# EAGLE board routed (EAGLE 9.6.2)
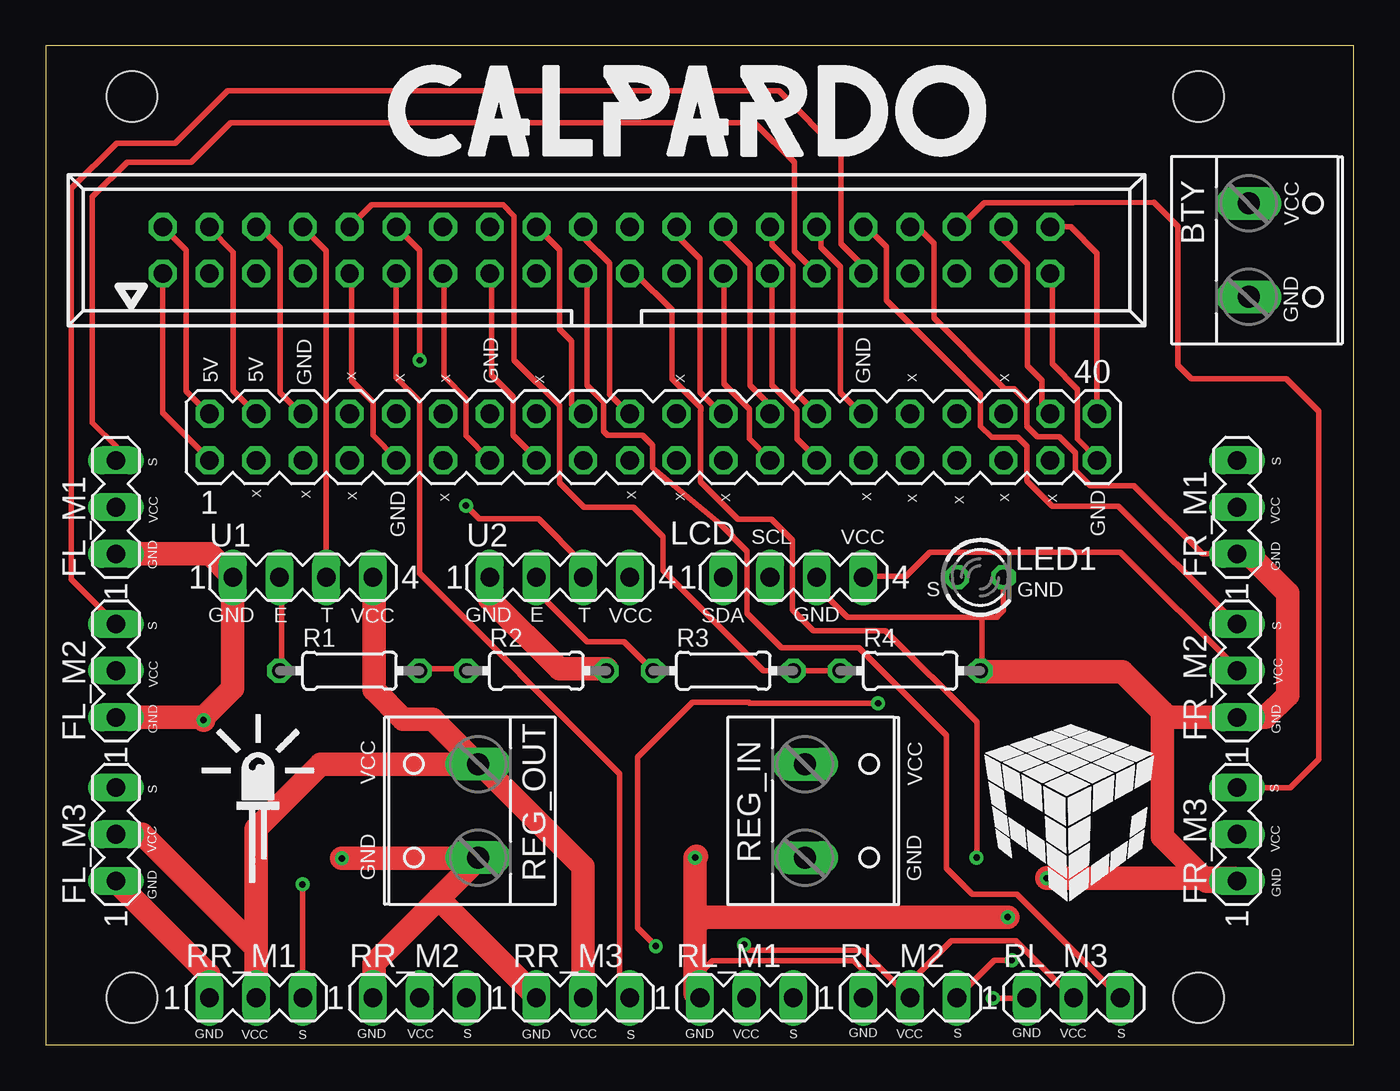
[diagram p0: board, top side]
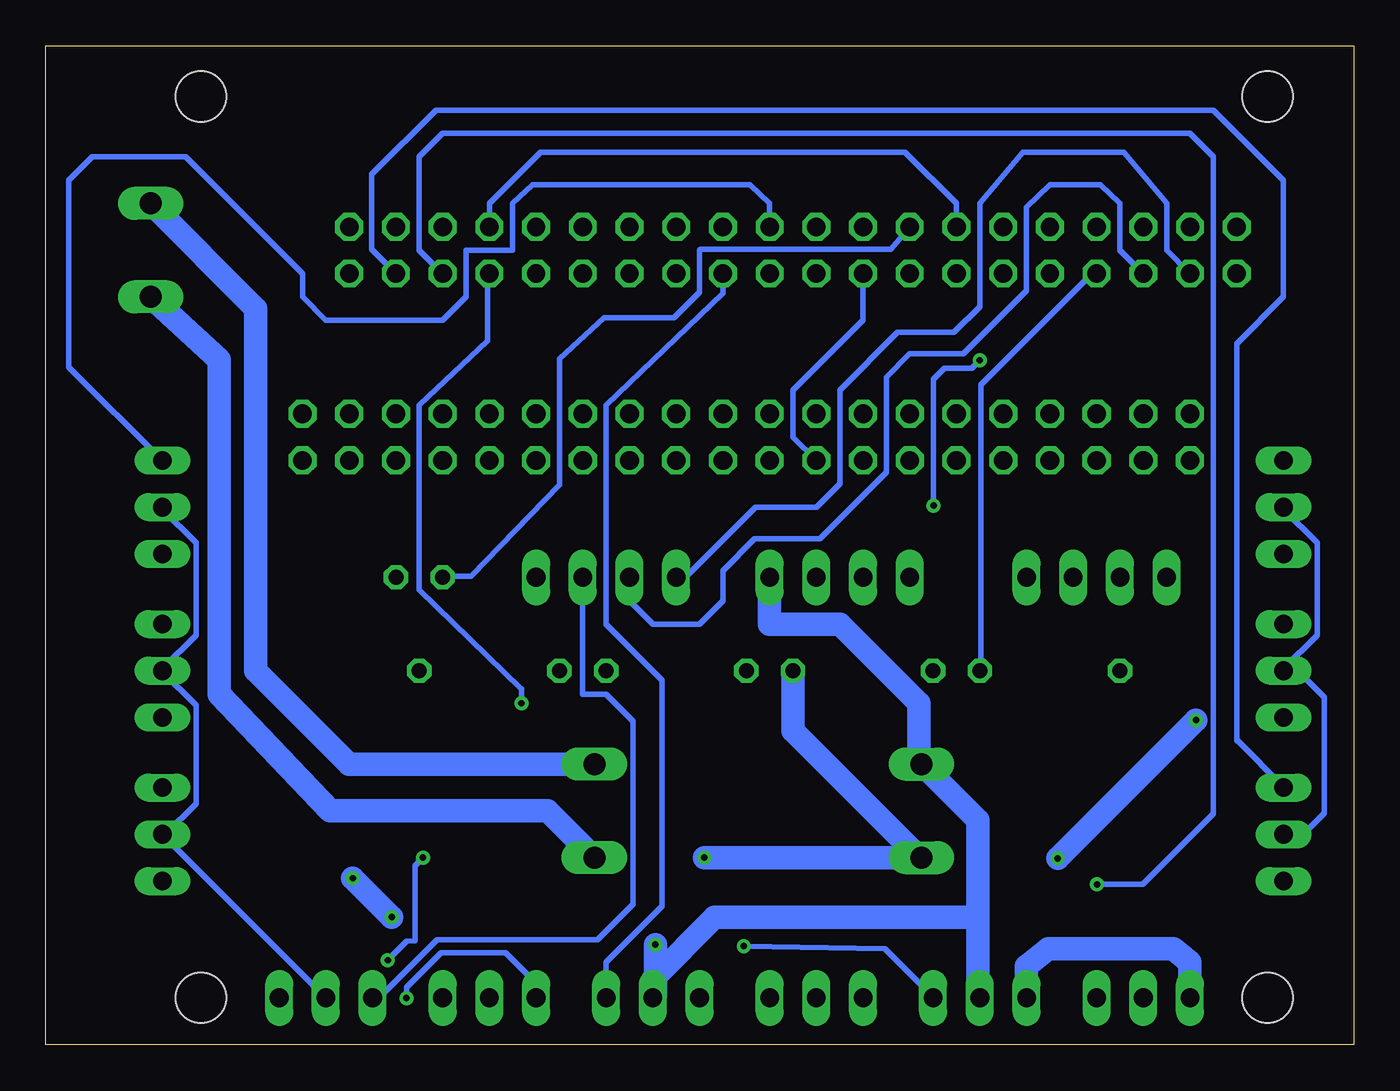
[diagram p1: board, bottom side, seen from below]

Size 71.1 x 54.28 mm. Coordinates in mm from the lower left corner, seen from the top.
Outline: 0,0 71.1,0 71.1,54.28 0,54.28 0,0
Copper layers (1*16): Top 0.035mm / dielectric 1.5mm / Bottom 0.035mm
Design rules "default": minimum track width 6mil, minimum drill 0.35mm, track to track 6mil, track to pad 6mil, pad to pad 6mil, via to via 6mil, smd to smd 6mil, copper to edge 40mil, drill to drill 6mil, minimum pad ring 10mil, minimum via ring 8mil, stop-mask expansion 4mil, vias tented up to drill 0mil, thermal gap 10mil
Holes 2.74 mm at 4.68,2.54 62.68,2.54 62.68,51.54 4.68,51.54

## Footprints (pad centres in the part's own frame; a part is rotated, then mirrored left to right if it is on the bottom)
W237-132 = drill 1.194 long: 1 -2.54,-0.635; 2 2.54,-0.635
MA03-1 = drill 1.016 long: 1 -2.54,0; 2 0,0; 3 2.54,0
MA04-1 = drill 1.016 long: 1 -3.81,0; 2 -1.27,0; 3 1.27,0; 4 3.81,0
LED3MM = drill 0.813 octagon: A -1.27,0; K 1.27,0
0204/7 = drill 0.813 octagon: 1 -3.81,0; 2 3.81,0
MA20-2 = drill 1.016 octagon: 1 -24.13,-1.27; 2 -24.13,1.27; 3 -21.59,-1.27; 4 -21.59,1.27; 5 -19.05,-1.27; 6 -19.05,1.27; 7 -16.51,-1.27; 8 -16.51,1.27; 9 -13.97,-1.27; 10 -13.97,1.27; 11 -11.43,-1.27; 12 -11.43,1.27; 13 -8.89,-1.27; 14 -8.89,1.27; 15 -6.35,-1.27; 16 -6.35,1.27; 17 -3.81,-1.27; 18 -3.81,1.27; 19 -1.27,-1.27; 20 -1.27,1.27; 21 1.27,-1.27; 22 1.27,1.27; 23 3.81,-1.27; 24 3.81,1.27; 25 6.35,-1.27; 26 6.35,1.27; 27 8.89,-1.27; 28 8.89,1.27; 29 11.43,-1.27; 30 11.43,1.27; 31 13.97,-1.27; 32 13.97,1.27; 33 16.51,-1.27; 34 16.51,1.27; 35 19.05,-1.27; 36 19.05,1.27; 37 21.59,-1.27; 38 21.59,1.27; 39 24.13,-1.27; 40 24.13,1.27
057-040-1 = drill 1 octagon: 1 -24.13,-1.27; 2 -24.13,1.27; 3 -21.59,-1.27; 4 -21.59,1.27; 5 -19.05,-1.27; 6 -19.05,1.27; 7 -16.51,-1.27; 8 -16.51,1.27; 9 -13.97,-1.27; 10 -13.97,1.27; 11 -11.43,-1.27; 12 -11.43,1.27; 13 -8.89,-1.27; 14 -8.89,1.27; 15 -6.35,-1.27; 16 -6.35,1.27; 17 -3.81,-1.27; 18 -3.81,1.27; 19 -1.27,-1.27; 20 -1.27,1.27; 21 1.27,-1.27; 22 1.27,1.27; 23 3.81,-1.27; 24 3.81,1.27; 25 6.35,-1.27; 26 6.35,1.27; 27 8.89,-1.27; 28 8.89,1.27; 29 11.43,-1.27; 30 11.43,1.27; 31 13.97,-1.27; 32 13.97,1.27; 33 16.51,-1.27; 34 16.51,1.27; 35 19.05,-1.27; 36 19.05,1.27; 37 21.59,-1.27; 38 21.59,1.27; 39 24.13,-1.27; 40 24.13,1.27

## Placement (x,y rotation side)
BTY  [W237-132]  66.04,43.18 270 top
FL_M1  [MA03-1]  3.81,29.21 90 top
FL_M2  [MA03-1]  3.81,20.32 90 top
FL_M3  [MA03-1]  3.81,11.43 90 top
FR_M1  [MA03-1]  64.77,29.21 90 top
FR_M2  [MA03-1]  64.77,20.32 90 top
FR_M3  [MA03-1]  64.77,11.43 90 top
LCD  [MA04-1]  40.64,25.4 0 top
LED1  TLLY4400  [LED3MM]  50.8,25.4 0 top
R1  330  [0204/7]  16.51,20.32 0 top
R2  470  [0204/7]  26.67,20.32 0 top
R3  330  [0204/7]  36.83,20.32 0 top
R4  470  [0204/7]  46.99,20.32 0 top
REG_IN  [W237-132]  41.91,12.7 270 top
REG_OUT  [W237-132]  22.86,12.7 90 top
RL_M1  [MA03-1]  38.1,2.54 0 top
RL_M2  [MA03-1]  46.99,2.54 0 top
RL_M3  [MA03-1]  55.88,2.54 0 top
RR_M1  [MA03-1]  11.43,2.54 0 top
RR_M2  [MA03-1]  20.32,2.54 0 top
RR_M3  [MA03-1]  29.21,2.54 0 top
SV1  [MA20-2]  33.02,33.02 0 top
U1  [MA04-1]  13.97,25.4 0 top
U2  [MA04-1]  27.94,25.4 0 top
X1  GPIO  [057-040-1]  30.48,43.18 0 top

## Library data of the parts
BTY REG_IN REG_OUT = con-wago-508; OC_FARNELL: unknown; OC_NEWARK: unknown
FL_M1-FL_M3 FR_M1-FR_M3 LCD RL_M1-RL_M3 RR_M1-RR_M3 SV1 U1 U2 = con-lstb; OC_FARNELL: unknown; OC_NEWARK: unknown
LED1 = led; MF: VISHAY SEMICONDUCTOR; OC_FARNELL: 1612439
R1-R4 = rcl; SPICEPREFIX: R
X1 = con-panduit; OC_FARNELL: unknown; OC_NEWARK: unknown

## Nets
E1: R1.1 U1.2
GND: FL_M1.1 FL_M2.1 FL_M3.1 FR_M1.1 FR_M2.1 FR_M3.1 LCD.3 LED1.K R2.2 R4.2 REG_OUT.1 RL_M1.1 RL_M2.1 RL_M3.1 RR_M1.1 RR_M2.1 RR_M3.1 U1.1 U2.1 X1.14 X1.34
GPIO_5: FL_M1.3 X1.29
GPIO_6: FL_M2.3 X1.31
GPIO_9: RL_M2.3 X1.21
GPIO_10: RL_M3.3 X1.19
GPIO_11: RL_M1.3 X1.23
GPIO_12: FR_M2.3 X1.32
GPIO_13: RR_M2.3 X1.33
GPIO_14: U1.3 X1.8
GPIO_15: R3.2 R4.1 X1.10
GPIO_16: FR_M3.3 X1.36
GPIO_17: RR_M3.3 X1.11
GPIO_18: U2.3 X1.12
GPIO_19: RR_M1.3 X1.35
GPIO_23: LED1.A X1.16
GPIO_25: FR_M1.3 X1.22
GPIO_26: FL_M3.3 X1.37
N$1: R3.1 U2.2
N$2: R1.2 R2.1 X1.7
N$3: SV1.2 X1.2
N$4: SV1.4 X1.4
N$5: SV1.6 X1.6
N$6: SV1.18 X1.18
N$7: SV1.20 X1.20
N$8: SV1.24 X1.24
N$9: SV1.26 X1.26
N$10: SV1.28 X1.28
N$11: SV1.30 X1.30
N$12: SV1.40 X1.40
N$13: SV1.38 X1.38
N$14: SV1.39 X1.39
N$15: BTY.1 REG_IN.1
N$16: BTY.2 REG_IN.2
N$17: SV1.27 X1.27
N$18: SV1.25 X1.25
N$19: SV1.1 X1.1
N$20: SV1.9 X1.9
N$21: SV1.13 X1.13
N$22: SV1.15 X1.15
N$23: SV1.17 X1.17
SCL: LCD.2 X1.5
SDA: LCD.1 X1.3
VCC: FL_M1.2 FL_M2.2 FL_M3.2 FR_M1.2 FR_M2.2 FR_M3.2 LCD.4 REG_OUT.2 RL_M1.2 RL_M2.2 RL_M3.2 RR_M1.2 RR_M2.2 RR_M3.2 U1.4 U2.4

## Tracks (layer width: path | path; a pad name or v marks a point on that pad's centre or on a via)
E1
  Top 0.305: R1.1 12.8,20.42 12.8,25.3 U1.2
GND  (via drill 0.35)
  Top 0.152: 17.83,2.59 RR_M2.1 | 50.9,20.27 R4.2
  Top 0.305: 3.81,8.84 FL_M3.1 2.96,8.89 | 10.06,24.38 10.06,25.3 U1.1 | FL_M2.1 3.58,17.78 | RL_M1.1 35.56,3.87 36.23,4.55 43.94,4.55 44.45,4.04 RL_M2.1 | 30.48,20.42 R2.2 | 23.47,10.06 REG_OUT.1 | 26.67,2.59 RR_M3.1 | 50.9,23.22 50.9,20.42 R4.2 | LED1.K 52.07,23.61 51.75,23.28 51.75,23.22 50.9,23.22 | LCD.3 41.91,24.89 43.59,23.22 50.9,23.22 | X1.34 47.38,44.45 48.27,43.56 48.27,39.51 52.12,35.66 52.63,35.66 53.34,34.95 53.34,33.6 53.91,33.03 55.12,33.03 55.98,32.17 55.98,31.18 56.78,30.38 59.16,30.38 62.87,26.67 FR_M1.1 | RL_M3.1 53.33,2.53 v51.5,2.53
  Top 1.27: 3.81,8.84 8.84,3.81 8.84,2.59 RR_M1.1 | FL_M2.1 8.57,17.78 | 30.48,20.42 27.92,20.42 24.13,24.22 U2.1 | 17.83,2.59 17.83,4.42 21.34,7.92 | 23.47,10.06 21.34,7.92 | 21.34,7.92 26.67,2.59 | 60.71,18.09 60.71,11.3 63.12,8.89 FR_M3.1 64.62,9.04 v54.41,9.04 54.41,9.06 | 50.9,20.27 58.52,20.27 60.71,18.09 | 60.71,18.09 61.01,17.78 FR_M2.1 66.29,17.78 67.51,19 67.51,24.52 65.37,26.67 FR_M1.1 | FL_M1.1 8.89,26.67 U1.1 10.16,19.37 8.57,17.78 | 8.57,17.78 v8.57,17.64 | v16.09,10.12 23.46,10.12 REG_OUT.1 | 35.37,10.23 v35.3,10.16 35.3,6.5 | 35.3,6.5 35.3,2.8 RL_M1.1 | 35.3,6.5 35.72,6.93 v52.3,6.93
  Bottom 0.152: 35.51,2.59 RL_M1.1
  Bottom 0.305: RL_M3.1 53.34,2.59 52.93,2.59 49.84,5.69 41.1,5.69 39.17,7.62 39.17,17.58 40.64,19.05 41.91,19.05 LCD.3 | 35.26,2.59 35.51,2.59 | 26.67,2.59 RR_M3.1 | X1.14 21.59,45.72 24.38,48.51 44.2,48.51 46.99,45.72 X1.34 | v51.5,2.53 51.5,3.11 49.62,4.99 46.1,4.99 44.45,3.34 RL_M2.1
  Bottom 1.27: R2.2 30.48,17.07 23.62,10.21 REG_OUT.1 v35.3,10.16 | RR_M2.1 17.78,4.27 16.61,5.21 9.81,5.21 8.89,4.47 RR_M1.1 | v8.57,17.64 v16.09,10.12 | v52.3,6.93 v54.41,9.04
GPIO_5
  Top 0.305: FL_M1.3 3.81,32.51 2.52,33.81 2.52,46.08 4.41,47.97 7.9,47.97 10.05,50.11 38.53,50.11 40.69,47.95 40.69,43.13 X1.29
GPIO_6
  Top 0.305: FL_M2.3 1.38,25.29 1.38,46.55 3.84,49 7.04,49 9.88,51.84 39.85,51.84 43.23,48.46 43.23,43.52 44.45,42.3 X1.31
GPIO_9  (via drill 0.35)
  Top 0.305: RL_M2.3 51.58,4.58 v52.51,4.58 | v50.6,10.16 50.61,10.17 50.61,17.54 45.66,22.49 41.74,22.49 40.6,23.64 40.6,27.41 39.45,28.56 37.63,28.56 35.59,30.61 35.59,34.44 35.61,34.47 35.61,34.61 34.04,36.18 34.04,39.94 32.07,41.91 X1.21
  Bottom 0.305: v52.51,4.58 51.48,5.62 51.04,5.64 51.04,9.72 v50.6,10.16
GPIO_10
  Top 0.152: 29.43,41.91 X1.19
  Top 0.305: 29.43,41.91 29.43,35.85 30.33,34.95 30.33,33.34 30.54,33.12 32.45,33.12 32.98,32.59 32.98,31.34 36.66,28.27 38.12,26.81 38.12,23.44 39.99,21.58 44.2,21.58 48.97,16.8 48.97,9.58 50.38,8.17 52.79,8.17 RL_M3.3
GPIO_11
  Bottom 0.305: X1.23 34.29,40.84 40.64,34.75 40.64,22.86 37.59,19.81 37.59,7.52 40.64,4.47 RL_M1.3
GPIO_12
  Top 0.305: X1.32 44.62,44.45 45.71,43.36 45.71,40.45 50.81,35.34 50.81,33.62 51.42,33.01 52.86,33.01 53.34,32.52 53.34,30.66 54.72,29.27 58.32,29.27 64.55,23.04 64.59,23.04 FR_M2.3
GPIO_13  (via drill 0.35)
  Top 0.305: v45.25,18.55 38.26,18.55 38.24,18.61 35.15,18.61 32.15,15.61 32.15,6.35 v33.16,5.35
  Bottom 0.305: v45.25,18.55 45.25,19.35 45.26,19.33 50.8,24.74 50.8,34.75 47.09,38.25 47.09,41.91 X1.33 | v33.16,5.35 25.47,5.2 22.86,2.59 RR_M2.3
GPIO_14
  Top 0.305: U1.3 15.24,43.16 13.99,44.4 X1.8
GPIO_15
  Top 0.305: R4.1 R3.2 39.01,20.32 33.55,25.78 33.55,27.6 31.94,29.21 29.25,29.21 27.93,30.53 27.93,34.75 25.46,37.21 25.46,45.03 24.85,45.64 17.7,45.64 X1.10
GPIO_16
  Top 0.152: 49.53,44.5 X1.36
  Top 0.305: 49.53,44.5 49.77,44.5 51.03,45.76 55.83,45.76 60.24,45.78 61.54,44.48 61.54,36.92 62.28,36.18 67.45,36.18 69.2,34.43 69.2,15.51 67.67,13.97 FR_M3.3
GPIO_17
  Top 0.305: X1.11 19.05,36.26 20.31,35 20.31,25.62 31.19,14.73 31.19,3.7 31.75,3.14 RR_M3.3
GPIO_18  (via drill 0.35)
  Top 0.305: U2.3 29.21,26.15 26.77,28.59 23.55,28.59 v22.84,29.3 | X1.12 20.32,43.18 v20.32,37.2
  Bottom 0.305: v22.84,29.3 22.84,36.17 22.25,36.75 20.77,36.75 v20.32,37.2
GPIO_19  (via drill 0.35)
  Top 0.305: RR_M1.3 13.97,8.69 v13.95,8.71
  Bottom 0.305: X1.35 50.8,43.18 50.8,48.26 49.53,49.53 8.89,49.53 7.62,48.26 7.62,12.55 11.45,8.72 v13.95,8.71
GPIO_23
  Bottom 0.305: X1.16 25.15,43.23 35.51,43.23 35.56,43.18 35.56,40.89 36.96,39.5 40.77,39.5 43.18,37.29 43.18,30.43 48,25.45 49.53,25.45 LED1.A
GPIO_25
  Bottom 0.305: 64.77,31.85 FR_M1.3 69.85,36.83 69.85,46.99 68.58,48.26 63.5,48.26 57.15,41.91 57.15,40.64 55.88,39.37 49.53,39.37 48.26,40.64 48.26,43.18 45.72,43.18 45.72,45.72 44.65,46.74 32.82,46.74 31.75,45.72 X1.22
GPIO_26
  Bottom 0.305: FL_M3.3 3.81,14.02 6.3,16.51 6.35,16.51 6.35,38.1 3.81,40.64 3.81,46.99 7.62,50.8 49.9,50.8 53.39,47.31 53.39,43.23 X1.37
N$1
  Top 0.305: U2.2 26.67,24.64 29.41,21.89 31.45,21.89 R3.1
N$2
  Top 0.152: 22.86,20.42 R2.1
  Top 0.305: 22.86,20.42 20.42,20.42 R1.2
  Bottom 0.152: 20.27,20.42 R1.2
  Bottom 0.305: X1.7 14.22,41.91 20.27,35.87 20.27,20.42
N$3
  Top 0.305: X1.2 7.62,43.18 7.62,35.51 8.84,34.29 SV1.2
N$4
  Top 0.305: X1.4 8.89,44.37 10.19,43.08 10.19,35.53 SV1.4
N$5
  Top 0.305: X1.6 11.58,44.45 12.72,43.31 12.72,35.43 13.87,34.29 SV1.6
N$6
  Top 0.305: SV1.18 29.08,34.29 28.57,34.8 28.57,38.23 27.91,38.89 27.91,43.2 X1.18
N$7
  Top 0.152: 29.26,44.35 X1.20
  Top 0.305: 29.26,44.35 29.26,43.84 30.63,42.47 30.63,35.36 31.7,34.29 SV1.20
N$8
  Top 0.305: X1.24 34.29,43.99 35.56,42.72 35.56,35.46 36.73,34.29 SV1.24
N$9
  Top 0.305: SV1.26 39.37,34.75 38.29,35.83 38.29,42.38 36.88,43.79 36.88,44.35 X1.26
N$10
  Top 0.305: SV1.28 40.62,35.59 40.62,42.34 39.47,43.48 39.47,44.35 X1.28
N$11
  Top 0.152: 44.35,34.29 SV1.30
  Top 0.305: X1.30 42.14,44.22 42.14,43.34 43.2,42.28 43.2,35.43 44.35,34.29
N$12
  Top 0.305: X1.40 55.73,44.45 57.15,43.03 SV1.40
N$13
  Top 0.305: X1.38 52.06,44.44 52.06,43.74 53.35,42.44 53.35,36.91 54.15,36.11 54.15,34.75 SV1.38
N$14
  Top 0.305: X1.39 54.71,41.91 54.71,36.99 56.08,35.62 56.08,32.92 57.15,31.85 SV1.39
N$15
  Bottom 1.27: BTY.1 59.69,40.01 59.69,20.32 54.61,15.24 REG_IN.1
N$16
  Bottom 1.27: BTY.2 61.67,37.24 61.67,19.05 55.65,12.7 43.81,12.7 REG_IN.2
N$17
  Top 0.152: 39.47,41.91 X1.27
  Top 0.305: 39.47,41.91 39.47,35.84 40.84,34.47 40.84,32.92 41.91,31.85 SV1.27
N$18
  Top 0.152: 39.32,31.85 SV1.25
  Top 0.305: 39.32,31.85 38.25,32.92 38.25,34.54 36.88,35.92 36.88,41.91 X1.25
N$19
  Top 0.305: X1.1 6.35,34.34 8.84,31.85 SV1.1
N$20
  Top 0.152: 16.61,41.91 X1.9
  Top 0.305: 16.61,41.91 16.61,36.09 17.78,34.92 17.78,33.12 19.05,31.85 SV1.9
N$21
  Top 0.152: 21.64,41.91 X1.13
  Top 0.305: 21.64,41.91 21.64,36.32 22.85,35.12 22.85,33.08 24.08,31.85 SV1.13
N$22
  Top 0.305: X1.15 24.23,41.91 24.23,36.37 25.39,35.22 25.39,33.13 26.67,31.85 SV1.15
N$23
  Bottom 0.305: SV1.17 30.48,33.02 30.48,35.56 26.67,39.37 X1.17
SCL
  Bottom 0.305: LCD.2 39.37,24.13 38.1,22.86 35.56,22.86 34.29,24.13 34.29,25.76 32.56,27.48 29.02,27.48 25.4,31.1 25.4,36.28 24.14,37.54 21.22,37.54 17.78,40.98 17.78,45.52 16.51,46.74 13.77,46.74 12.7,45.72 12.7,43.18 X1.5
SDA
  Bottom 0.305: LCD.1 36.34,25.4 32.52,29.21 29.21,29.21 27.94,30.48 27.94,35.56 24.79,38.71 21.72,38.71 20.32,40.11 20.32,45.72 17.99,48.51 12.49,48.51 10.16,45.72 10.16,43.18 X1.3
VCC  (via drill 0.35)
  Top 0.152: 23.47,15.24 REG_OUT.2
  Top 0.305: RL_M3.2 55.78,2.59 52.73,5.64 49.23,5.64 47.09,3.5 47.09,2.59 RL_M2.2 44.4,5.13 38.27,5.13 v37.96,5.44 | LCD.4 44.5,25.45 46.75,25.45 48.06,26.76 58.43,26.76 64.77,20.42 FR_M2.2 | 23.62,15.24 REG_OUT.2 23.16,15.54 23.47,15.24 | 17.83,25.3 U1.4 | 11.43,5.23 RR_M1.2
  Top 1.27: RR_M3.2 29.2,2.55 29.2,9.66 23.62,15.24 14.94,15.24 11.43,11.73 RR_M1.2 | 17.83,25.3 17.83,19.28 19.43,17.68 21.03,17.68 23.16,15.54 | 11.43,5.23 5.23,11.43 FL_M3.2
  Bottom 0.152: 64.77,20.27 FR_M2.2 64.77,20.42 | 23.47,15.24 REG_OUT.2 23.62,15.24
  Bottom 0.305: 64.77,20.27 62.94,18.44 62.94,13.1 64.61,11.43 FR_M3.2 RL_M3.2 | 64.77,20.42 62.94,22.25 62.94,27.28 64.77,29.11 FR_M1.2 | FL_M1.2 3.81,29.11 1.98,27.28 1.98,22.25 3.81,20.42 FL_M2.2 3.04,20.32 1.6,18.88 1.6,12.56 2.73,11.43 FL_M3.2 | 20.42,2.59 RR_M2.2 | 37.96,2.68 RL_M1.2
  Bottom 1.27: 20.42,6.91 20.42,12.19 23.47,15.24 | 20.42,6.91 20.42,2.59 | RL_M1.2 38.1,3.56 34.75,6.91 20.42,6.91 | U2.4 31.75,22.86 27.94,22.86 23.62,18.54 23.62,15.24 | v37.96,5.44 37.96,2.68

## Text on the board
tPlace: VCC | GND | 5V | 5V | GND | X | X | X | GND | X | X | GND | X | X | S | S | X | X | X | X | X | X | X | X | X | X | X | X | VCC | GND | GND | VCC | SCL | VCC | GND | GND | S | GND | S | GND | E | T | VCC | GND | E | T | VCC | SDA | GND | S | VCC | VCC | GND | GND | S | VCC | VCC | S | VCC | VCC | GND | GND | GND | GND | GND | VCC | S | GND | VCC | S | GND | VCC | S | GND | VCC | S | GND | VCC | S | GND | VCC | S